# Altium PCB AT89C51.PcbDoc
Units mil, origin at the board's own origin, x right, y up, seen from the top; angles counter-clockwise.
Board outline 10535 x 9685 mil, 2 copper layers (Top Layer, Bottom Layer); 61 components, 49 nets, 164 pads, 8 vias.
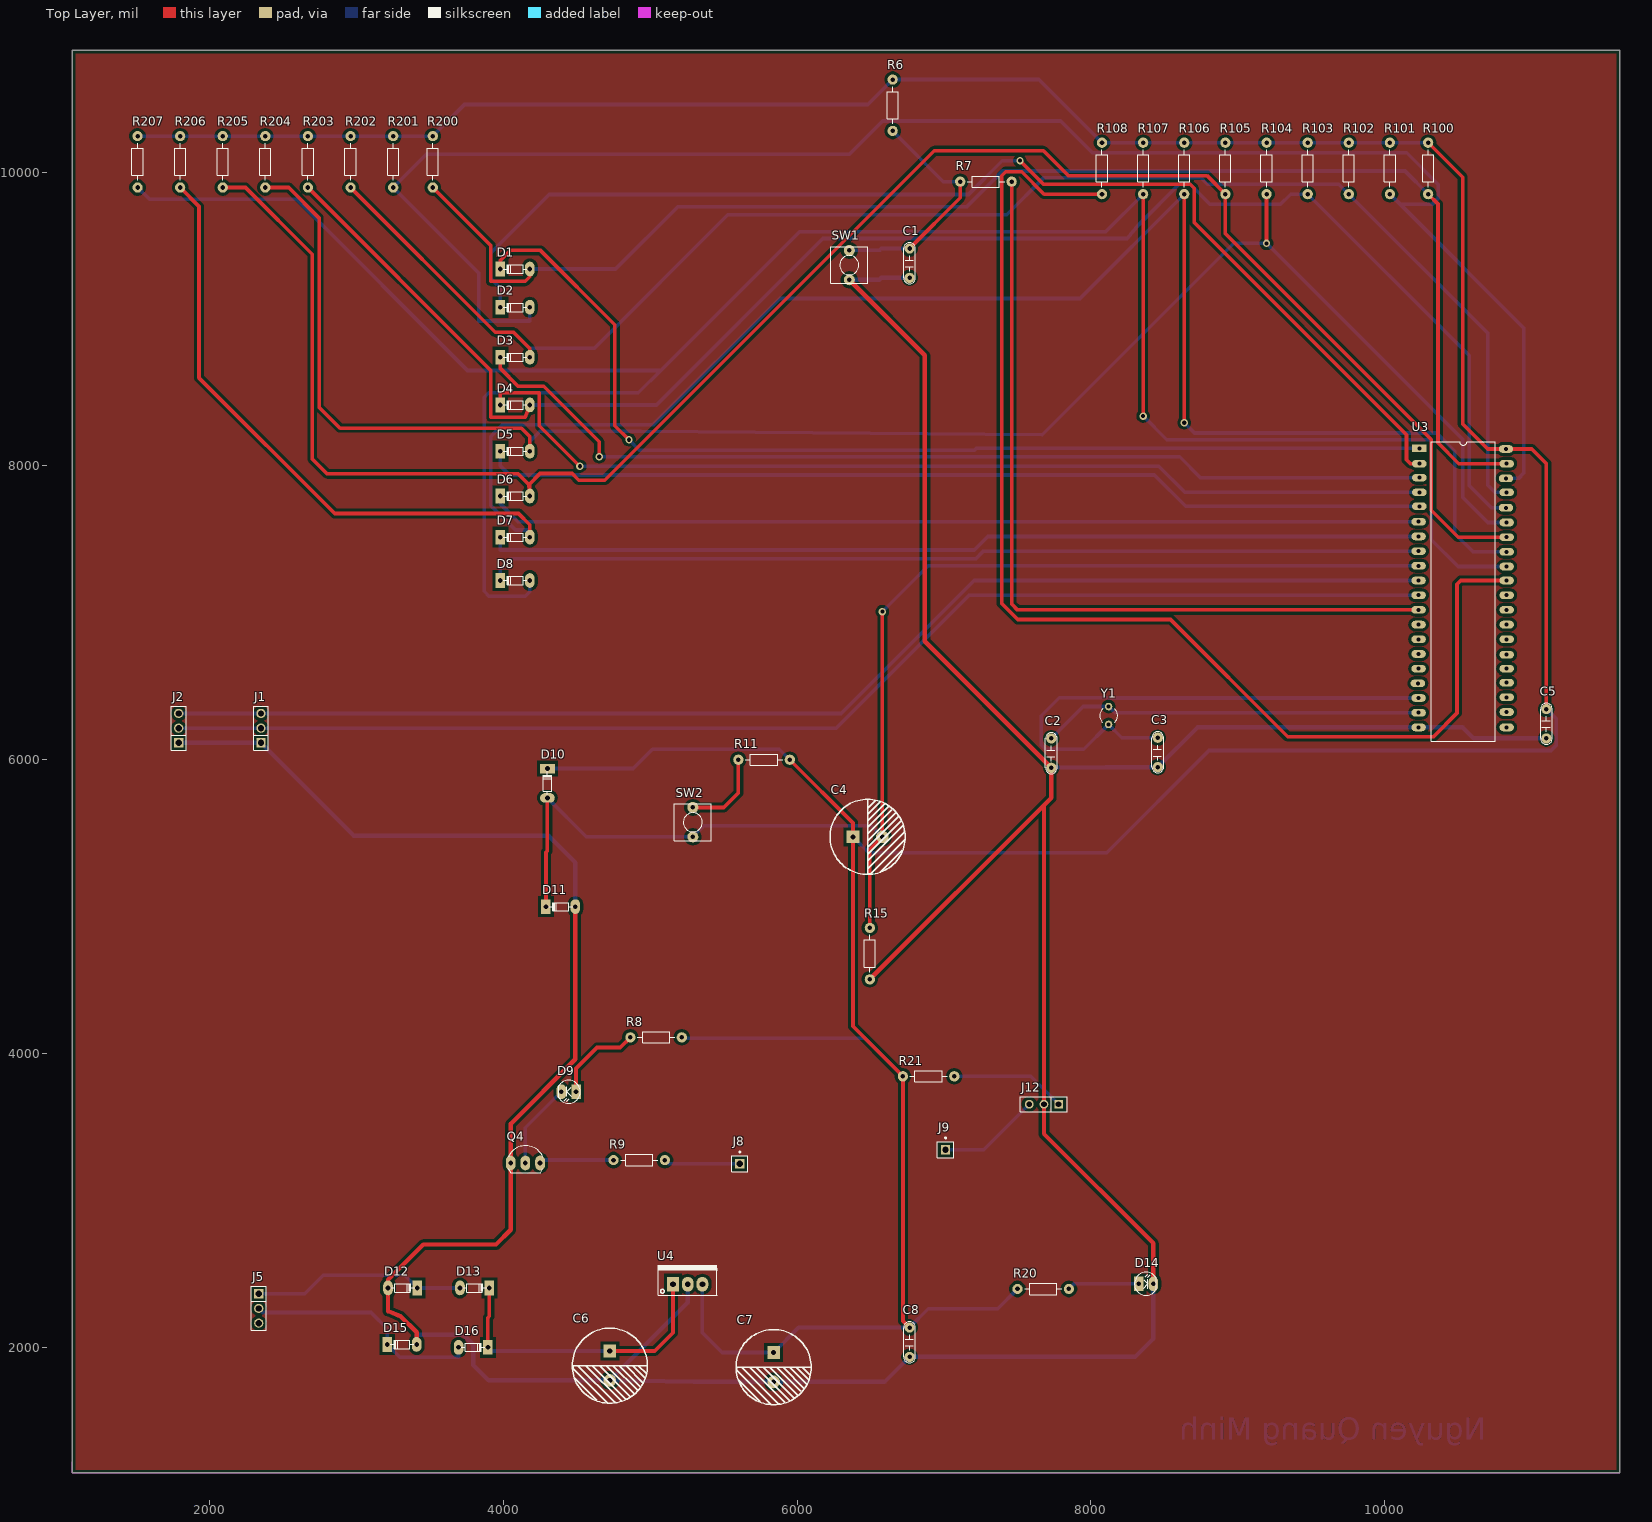
[diagram p0: Top Layer view]
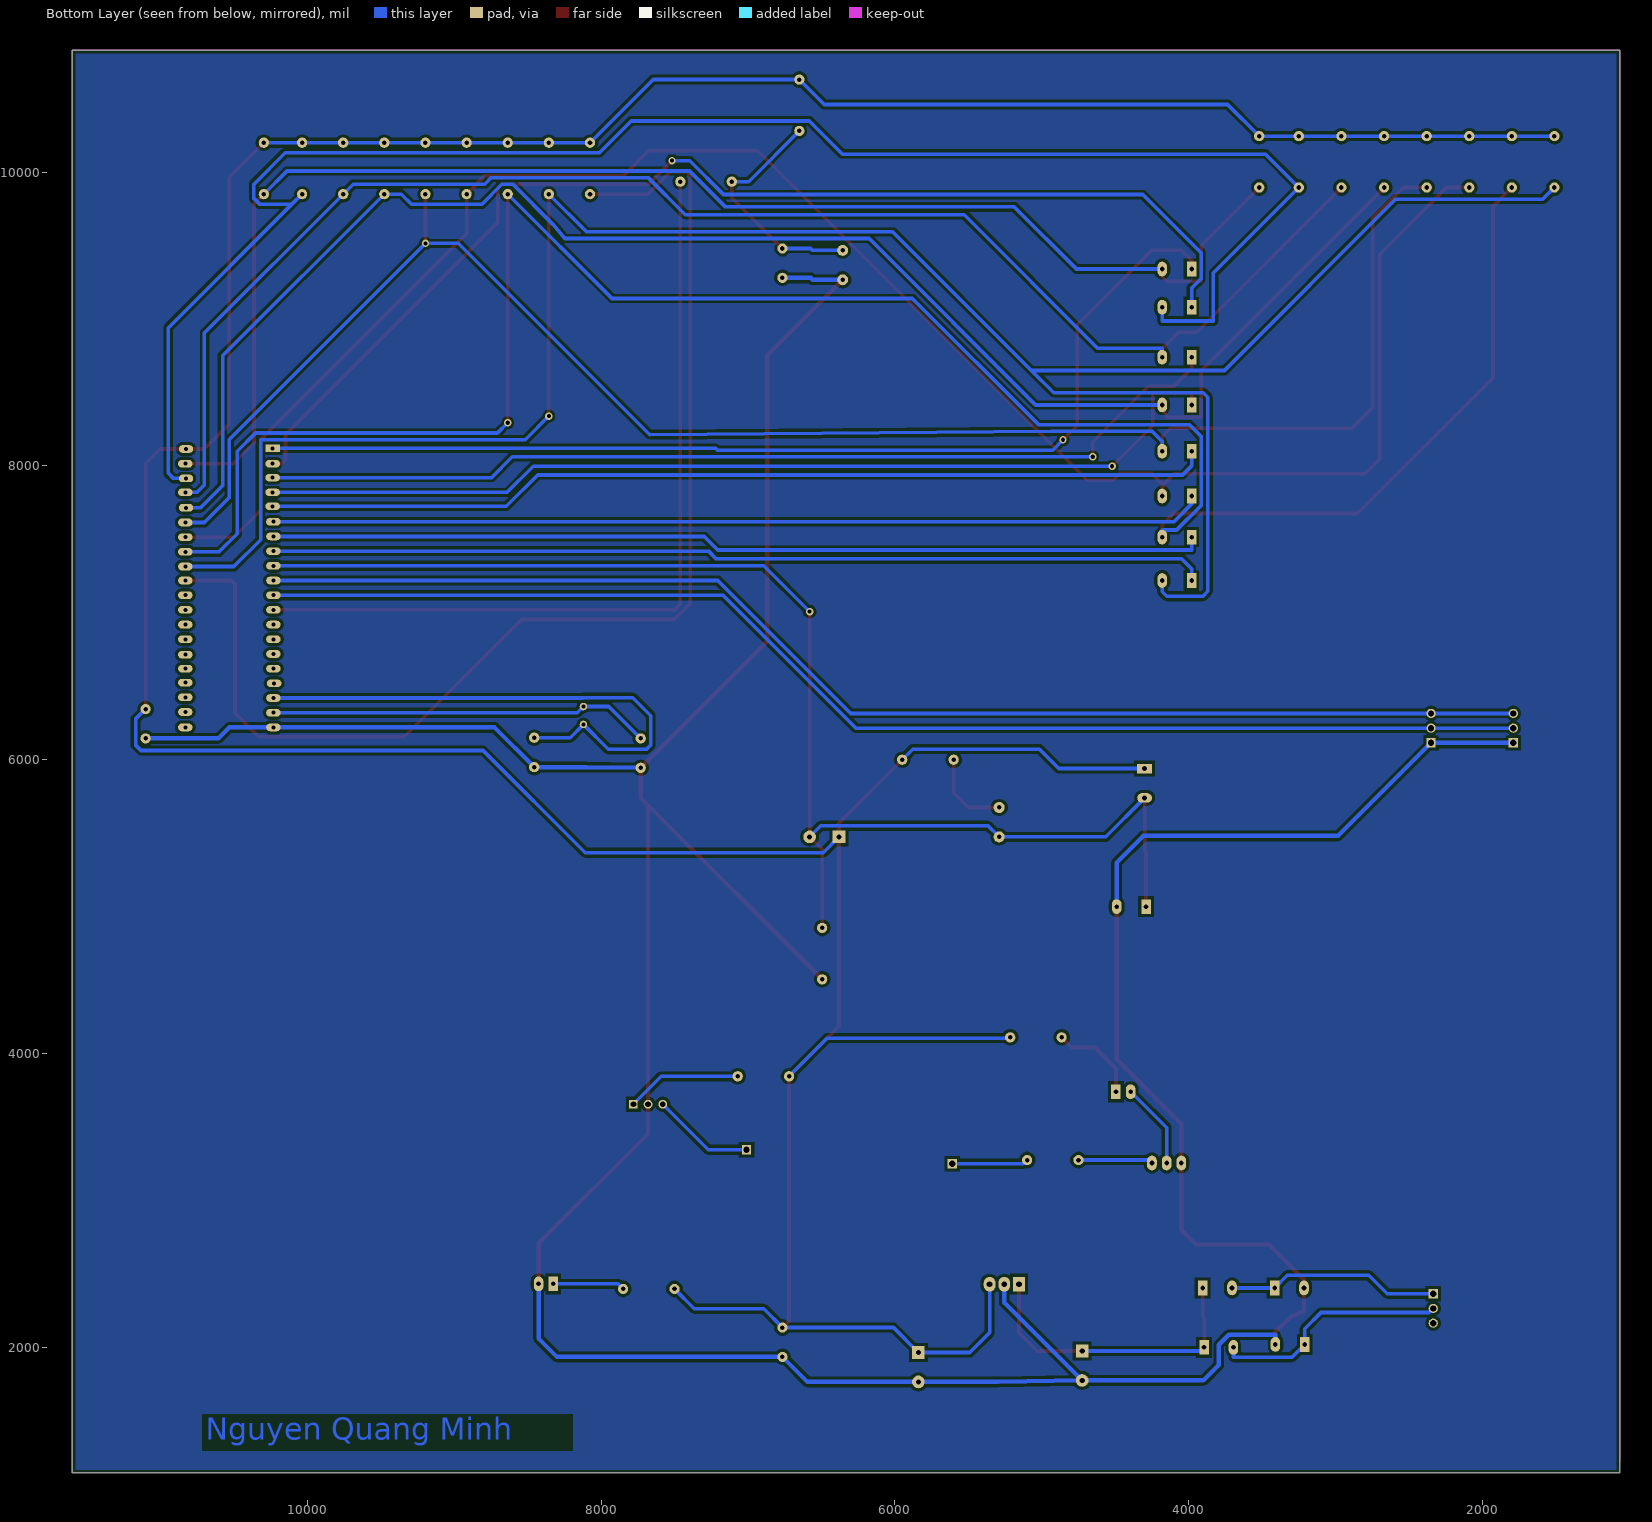
[diagram p1: Bottom Layer view, seen from below]
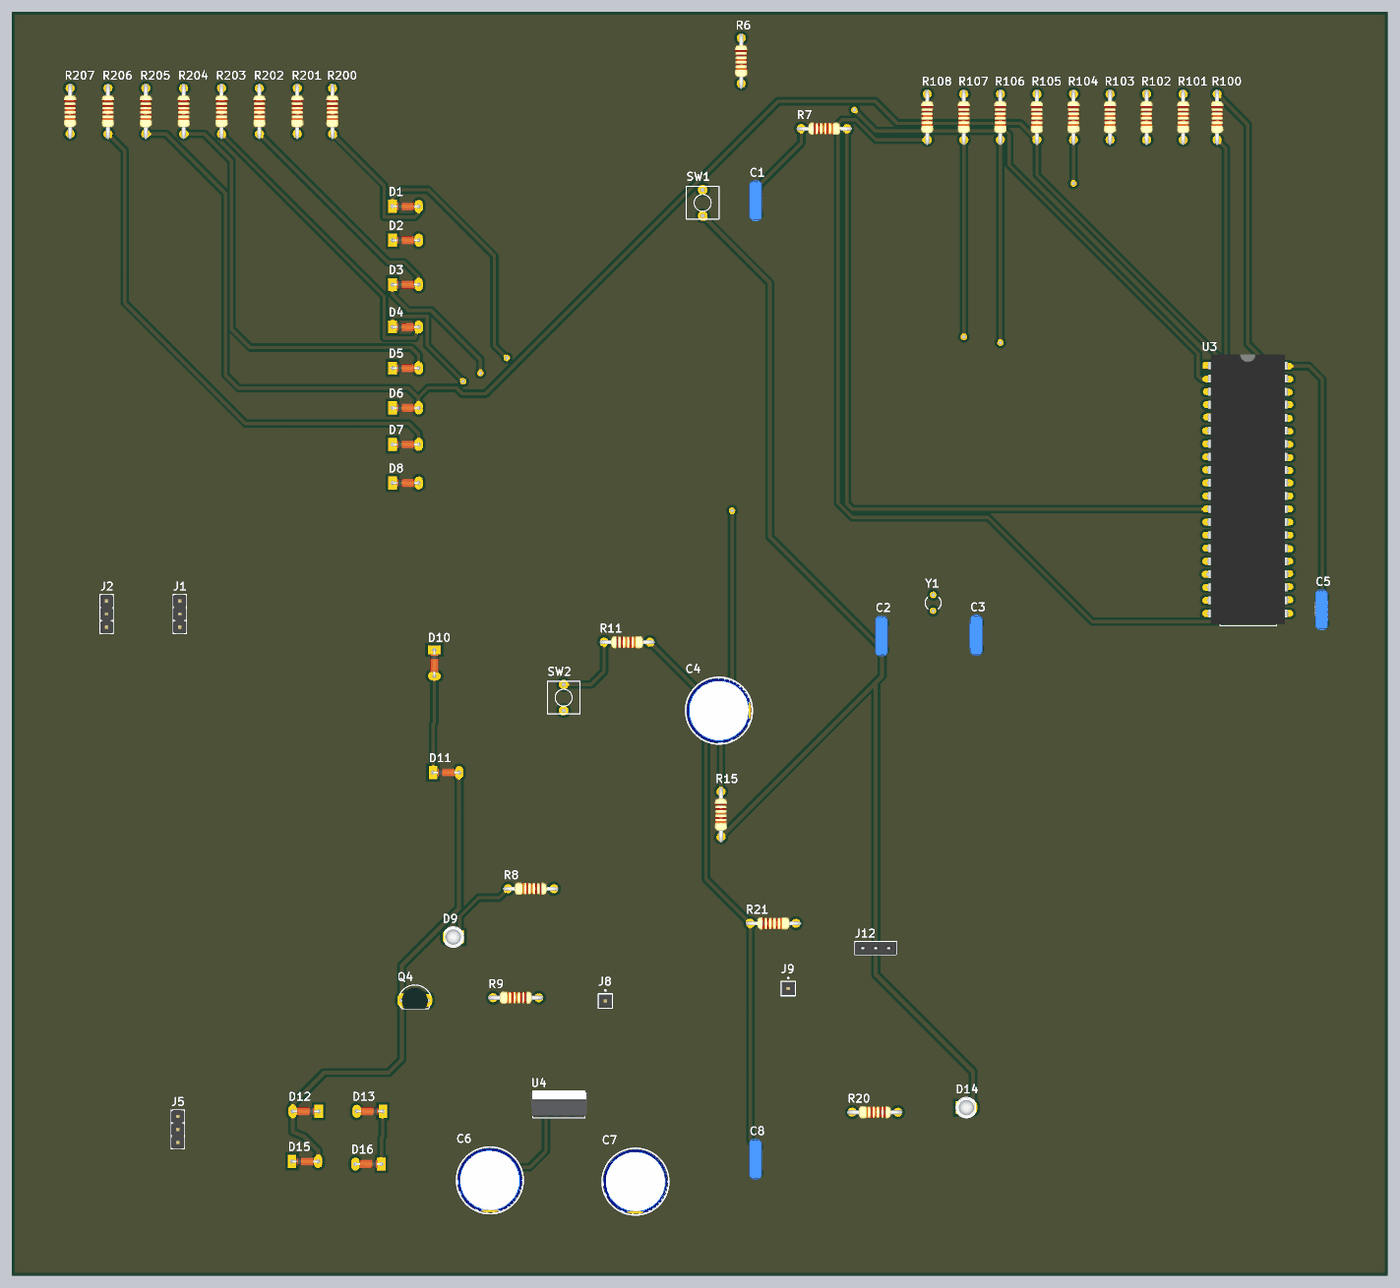
[diagram p2: 3D render of the assembled board from above, using the file's embedded part models]

## Layer stack, top to bottom
Top Solder: solder mask 0.4, Solder Resist, Dk 3.5
Top Layer: signal copper 1.4
Dielectric 1: dielectric 12.6, FR-4, Dk 4.8
Bottom Layer: signal copper 1.4
Bottom Solder: solder mask 0.4, Solder Resist, Dk 3.5

## Board outline
1065,1145 1065,1220 1065,10830 11600,10830 11600,1145

## Design rules (kind name [scope] priority, off if disabled: settings)
Clearance [All] p1: gap=20 ignorepadtopadclearanceinfootprint=FALSE
PolygonConnect [All] p1: connectstyle=Relief reliefconductorwidth=10 reliefentries=4 polygonreliefangle="90 Angle" airgapwidth=10
RoomDefinition AT89C51 [InComponentClass('AT89C51')] p1: confinementstyle=ConfineIn formatcopy=TRUE lockcomponents=FALSE outline 28860,1085 24235,1085 24235,3310 28860,3310
RoutingVias [All] p1: holewidth=28 width=50 viastyle="Through Hole" minholewidth=28 minwidth=50 maxholewidth=28 maxwidth=50
SolderMaskExpansion [All] p1: expansion=4 istentingtop=FALSE
Width "Schematic Width Constraint" [InNet('GND')] p1: maxlimit=30 minlimit=30 preferedwidth=30
Width [All] p2: maxlimit=30 minlimit=20 preferedwidth=25
30 further rules are at their usual default settings.

## Components (designator, comment, footprint, x,y, rotation, side; value= is the part's Value field where it differs from the comment)
C1 "104" CN2 6765,9280 r90 top value=0.1uF
C2 "104" CN2 7730,5945 r90 top value=0.1uF
C3 "104" CN2 8455,5950 r90 top value=0.1uF
C4 "10uF" "tu hoa 13mm" 6480,5475 r0 top
C5 "104" CN2 11100,6145 r90 top value=0.1uF
C6 "10uF" "tu hoa 13mm" 4725,1875 r270 top
C7 "10uF" "tu hoa 13mm" 5840,1865 r270 top
C8 "104" CN2 6765,1935 r90 top value=0.1uF
D1 "100v" "DIODE 0.5A" 4080,9340 r0 top
D2 "100v" "DIODE 0.5A" 4080,9080 r0 top
D3 "100v" "DIODE 0.5A" 4080,8740 r0 top
D4 "100v" "DIODE 0.5A" 4080,8415 r0 top
D5 "100v" "DIODE 0.5A" 4080,8100 r0 top
D6 "100v" "DIODE 0.5A" 4080,7795 r0 top
D7 "100v" "DIODE 0.5A" 4080,7515 r0 top
D8 "100v" "DIODE 0.5A" 4080,7220 r0 top
D9 "LED" LED-3 4495,3740 r180 top value="LED 3 ly Single Colour"
D10 "100v" "DIODE 0.5A" 4300,5840 r270 top
D11 "100v" "DIODE 0.5A" 4390,5000 r0 top
D12 "100v" "DIODE 0.5A" 3315,2404.5 r180 top
D13 "100v" "DIODE 0.5A" 3805,2404.5 r180 top
D14 "LED" LED-3 8325,2432.4 r0 top value="LED 3 ly Single Colour"
D15 "100v" "DIODE 0.5A" 3310,2020 r0 top
D16 "100v" "DIODE 0.5A" 3795,2000 r180 top
J1 "JP 1x3 2.54" "JP 1x3 DT" 2350,6115 r90 top
J2 "JP 1x3 2.54" "JP 1x3 DT" 1790,6115 r90 top
J5 "JP 1x3 2.54" "JP 1x3 DT" 2335,2365 r270 top
J8 "JP 1x1 2.54" "JP 1x1 DT" 5610,3250 r0 top
J9 "JP 1x1 2.54" "JP 1x1 DT" 7010,3345 r0 top
J12 "JP 1x3 2.54" "JP 1x3 CT" 7780,3655 r180 top
Q4 "C1815" TO92 4150,3255 r0 top value=C9014
R6 "Res1" R1/4W 6650,10280 r90 top value=1K
R7 "Res1" R1/4W 7460,9935 r180 top value=1K
R8 "Res1" R1/4W 4865,4110 r0 top value=1K
R9 "Res1" R1/4W 4750,3275 r0 top value=1K
R11 "Res1" R1/4W 5950,6000 r180 top value=1K
R15 "Res1" R1/4W 6495,4505 r90 top value=1K
R20 "Res1" R1/4W 7500,2397.5 r0 top value=1K
R21 "Res1" R1/4W 7070,3845 r180 top value=1K
R100 "Res1" R1/4W 10295,9850 r90 top value=1K
R101 "Res1" R1/4W 10035,9850 r90 top value=1K
R102 "Res1" R1/4W 9755,9850 r90 top value=1K
R103 "Res1" R1/4W 9475,9850 r90 top value=1K
R104 "Res1" R1/4W 9195,9850 r90 top value=1K
R105 "Res1" R1/4W 8915,9850 r90 top value=1K
R106 "Res1" R1/4W 8635,9850 r90 top value=1K
R107 "Res1" R1/4W 8355,9850 r90 top value=1K
R108 "Res1" R1/4W 8075,9850 r90 top value=1K
R200 "Res1" R1/4W 3520,9895 r90 top value=1K
R201 "Res1" R1/4W 3250,9895 r90 top value=1K
R202 "Res1" R1/4W 2960,9895 r90 top value=1K
R203 "Res1" R1/4W 2670,9895 r90 top value=1K
R204 "Res1" R1/4W 2380,9895 r90 top value=1K
R205 "Res1" R1/4W 2090,9895 r90 top value=1K
R206 "Res1" R1/4W 1800,9895 r90 top value=1K
R207 "Res1" R1/4W 1510,9895 r90 top value=1K
SW1 "SW" SW2 6355,9267.02 r90 top value="SW chip 2 pin"
SW2 "SW" SW2 5290,5475 r90 top value="SW chip 2 pin"
U3 "AT89C51" AT89C51 10235,8115 r0 top
U4 "LM7805" QTO-220 5155,2430 r0 top
Y1 "XTAL" R38 8120,6301.02 r0 top

## Footprints (in the part's own frame and the unit in brackets; to place one, negate y for a bottom-side part, rotate by r counter-clockwise, add the part's x,y. Pads: shape width x height; smd on the part's side, far side on the other; paste and mask are expansions set on the pad)
AT89C51 [mm]
  rect 2.5x1.33 hole 0.69: 1(0,0.127)
  oval 2.5x1.33 hole 0.69: 2(0,-2.54) 3(0,-4.953) 4(0,-7.493) 5(0,-9.906) 6(-0.127,-12.573) 7(-0.127,-15.113) 8(-0.127,-17.653) 9(-0.127,-20.193) 10(-0.127,-22.733) 11(-0.127,-25.273) 12(-0.127,-27.813) 13(-0.127,-30.353) 14(-0.127,-32.893) 15(-0.127,-35.433) 16(-0.127,-37.973) 17(-0.254,-40.513) 18(-0.127,-43.053) 19(-0.127,-45.593) 20(-0.127,-48.133) 21(15.113,-48.133) 22(15.113,-45.466) 23(15.113,-42.926) 24(15.113,-40.386) 25(15.113,-37.973) 26(15.113,-35.56) 27(15.113,-32.893) 28(15.113,-30.353) 29(15.113,-27.813) 30(15.113,-25.273) 31(15.113,-22.733) 32(15.113,-20.32) 33(15.113,-17.78) 34(15.113,-15.24) 35(15.113,-12.7) 36(14.986,-10.16) 37(15.113,-7.493) 38(14.986,-5.08) 39(15.113,-2.54) 40(14.986,0)
  silkscreen extent 2.08,-50.51 13.11,1.29, body extent -0.26,-50.3 15.24,2.3, height 5
CN2 [mil]
  round 70 hole 31: 1(0,0) 2(200,0)
  silkscreen extent -40,-40 240,40, body extent -54,-44 260,55, height 407
"DIODE 0.5A" [mil] "Diode muoi, xung"
  oval 65x100 hole 32: 1(100,0)
  rect 65x100 hole 32: 2(-100,0)
  silkscreen extent -80,-30 80,28, body extent -108,-33 108,32, height 61
"JP 1x1 DT" [mm] "1pins, 1 row, straight, gold plating"
  rect 1.6x1.6 hole 1.1: 1(0,0)
  silkscreen extent -1.4,-1.4 1.4,2.17, body extent -1.27,-1.27 1.27,1.27, height 8.54
"JP 1x3 CT" [mm]
  rect 1.52x1.52 hole 1.02: 1(0,0)
  round 1.52 hole 1.02: 2(2.54,0) 3(5.08,0)
  silkscreen extent -1.52,-1.27 6.6,1.27, body extent -1.52,-1.25 6.6,1.25, height 8.51
"JP 1x3 DT" [mm]
  rect 1.6x1.6 hole 1.1: 1(0,0)
  round 1.6 hole 1.1: 2(2.54,0) 3(5.08,0)
  silkscreen extent -1.27,-1.27 6.35,1.27, body extent -1.27,-1.27 6.35,1.27, height 8.54
LED-3 [mil] "LED 2 PIN, 3ly Only colour"
  rect 65x100 hole 32: 1(0,0)
  oval 65x100 hole 32: 2(100,0)
  silkscreen extent -29,-78 118,79, body extent -25,-75 113,75, height 217
QTO-220 [mil] "TO-220 - 1-2-3"
  rect 80x100 hole 39: 1(0,0)
  oval 80x100 hole 39: 2(100,0) 3(200,0)
  silkscreen extent -100,-76 300,130, body extent -119,-64 322,121, height 755
R1/4W [mil] "R 1/4W, 2 Pin, 350mil"
  round 70 hole 31: 1(0,0) 2(350,0)
  silkscreen extent 48,-38 302,38, body extent -40,-47 386,47, height 111
R38 [mm] "Crystal, Thru-Hole; 2 Leads; Body 3.1 x 8.2 mm (Dia.xH)"
  round 1.3 hole 0.7: 1(0,1.55) 2(0,-1.55)
  silkscreen extent -1.55,-1.19 1.55,1.17
SW2 [mil] "SW button 2pin, 250x 250 mil"
  round 75 hole 31: 1(0,0) 2(200,0)
  silkscreen extent -25,-125 225,125
TO92 [mil] "TO-92"
  oval 66x100 hole 32: 1(-100,0) 2(0,0) 3(100,0)
  silkscreen extent -117,-65 120,118, body extent -109,-66 109,95, height 245
"tu hoa 13mm" [mm]
  rect 2.2x2.2 hole 0.9: 1(-2.54,0)
  round 2.2 hole 0.9: 2(2.54,0)
  silkscreen extent -6.5,-6.5 6.5,6.5, body extent -6.25,-6.25 6.26,6.25, height 23.02

## Part data
C1 C2 C3 C5 C8: library part CN2, "Cap np 104 => 105pF"
C4 C6 C7: library part "Tu Hoa 10uF 450V 13x20", "Cắm", Chung_Loai=Cắm, Don_Vi=Con, Ma_Hang=MH003950, So_Chan=2, Ten_Linh_Kien="Tụ Hóa 10uF 450V 13x20MM"
D1 D2 D3 D4 D5 D6 D7 D8 D10 D11 D12 D13 D15 D16: library part "Diode 1N4148", "Cắm", Chung_Loai=Cắm, Don_Vi=Con, Ma_Hang=MH001065, Ten_Linh_Kien="Diode 1N4148 DO35 450mA 100V ( 1N4148 DIP)"
D9 D14: "LED Single colour Green and Red"
J1 J2 J5: library part "JP 1x3 2.54 Duc Thang", "Cắm", Chung_Loai=Cắm, Don_Vi=Con, Ma_Hang=MH000903, Ten_Linh_Kien="Jump Đơn Đực 2.54MM 1x40P Thẳng 11MM"
J8 J9: library part "JP 1x1 2.54 Duc Cong", "Cắm", Chung_Loai=Cắm, Don_Vi=Con, Ma_Hang=MH000904, Ten_Linh_Kien="Jump Đơn Đực 2.54MM 1x40P Cong Đứng"
J12: library part "JP 1x3 2.54 Cai Thang", "Cắm", Chung_Loai=Cắm, Don_Vi=Con, Ma_Hang=MH004006, Ten_Linh_Kien="Jump Đơn Cái 2.54MM 1x20P Thẳng"
Q4: "NPN transistor"
R6 R7 R8 R9 R11 R15 R20 R21 R100 R101 R102 R103 R104 R105 R106 R107 R108 R200 R201 R202 R203 R204 R205 R206 R207: library part Res1_1, "Resistor", Manufacturer="Generic Components", Class=Passive, Published=08/06/2000, Publisher="Altium Hobart Technology Centre", SubClass=Resistor
SW1 SW2: library part SW2, "Switch button 2 pin"
U4: library part LM78xx, "On ap +, from + 5 to + 24VDC"
Y1: "Crystal Oscillator", LatestRevisionDate=17-Jul-2002, LatestRevisionNote="Re-released for DXP Platform.", PackageDescription="Crystal, Thru-Hole; 2 Leads; Body 3.1 x 8.2 mm (Dia.xH)", PackageReference=R38, Published=8-Jun-2000, Publisher="Altium Limited"

## Via types
v1: diameter 50, hole 28, Top Layer to Bottom Layer, 8 vias

## Nets (pads, with @x,y where several pads share a name; then routed paths per layer and width w, separated by ;. In a path a pad name is that pad's centre, name@x,y a point inside that pad or via, vN(x,y) a via of type N, cw(c..) or ccw(c..) an arc to the next point about the centre after c; other vN are vias at no path point)
1: C4.1 C5.2 C7.1 C8.2 D10.2 R6.2 R8.2 R11.1 R20.1 R21.2 R100.2 R101.2 R102.2 R103.2 R104.2 R105.2 R106.2 R107.2 R108.2 R200.2 R201.2 R202.2 R203.2 R204.2 R205.2 R206.2 R207.2 U3.40 U4.3 | length 29158.2
  Top Layer w25: R11.1 6380,5570 C4.1 6380,4185 R21.2 6720,2180 C8.2 ; R100.2 10530,9965 10530,8285 10700,8115 U3.40 11000,8115 11100,8015 C5.2
  Bottom Layer w25: R207.2 R206.2 R205.2 R204.2 R203.2 R202.2 R201.2 R200.2 3735,10460 6480,10460 R6.2 7645,10630 R108.2 R107.2 R106.2 R105.2 R104.2 R103.2 R102.2 R101.2 R100.2 ; D10.2 4884,5940 5016,6072 5878,6072 R11.1 ; R8.2 5220,4105 6460,4105 R21.2 ; U4.3 5355,2100 5490,1965 C7.1 6010,2135 C8.2 6893,2263 7365.5,2263 R20.1 ; C4.1 6488,5367 8107,5367 8803,6063 11131,6063 11168,6100 11168,6277 C5.2
2: D1.1 R100.1 R200.1 U3.39 | length 9836.3
  Top Layer w25: R200.1 3915,9500 3915,9257 4150,9257 4180,9287 D1.1 ; R100.1 10361.71,9783.29 10361.71,8157.29 10504,8015 U3.39
  Bottom Layer w25: D1.1 4764,9340 5187,9763 7153,9763 7397.5,10007.5 10137.5,10007.5 R100.1
3: D2.1 R101.1 R201.1 U3.38 | length 11856
  Bottom Layer w25: D2.1 4180,8986 3832,8986 3832,9313 R201.1 3477,10122 6357,10122 6583,10348 7794,10348 8010,10132 10149,10132 10363,9918 10363,9820 10325,9782 10103,9782 ; R101.1 10103,9782 ; U3.38 10910,7915 10945,7950 10945,8940 10103,9782
4: D3.1 R102.1 R202.1 U3.37 | length 10418.8
  Top Layer w25: R202.1 3945,8910 4070,8910 4180,8800 D3.1
  Bottom Layer w25: D3.1 4180,8800 4618,8800 5528,9710 7427,9710 7679.5,9962.5 8747.72,9962.5 8792.22,9918 9687,9918 R102.1 10700,8905 10700,7870 10750,7820 U3.37
5: D4.1 R103.1 R203.1 U3.36 | length 11162.8
  Top Layer w25: R203.1 3915,8650 3915,8332 4150,8332 D4.1
  Bottom Layer w25: D4.1 5042,8415 6174.5,9547.5 8246.5,9547.5 8326.32,9643.82 8600,9917.5 8675,9917.5 8812.5,9780 9289,9780 9359,9850 R103.1 10576,8749 10576,7865 10726,7715 U3.36
6: D5.1 R104.1 R204.1 U3.35 | length 11994.8
  Top Layer w25: R204.1 2539,9895 2746,9688 2746,8400 2889,8257 4123,8257 4180,8200 D5.1 ; v1(9195,9515) R104.1
  Bottom Layer w25: D5.1 4180,8166 4250,8236 4936.24,8236 7669,8212 8972,9515 v1(9195,9515) 10530,8180 10530,7785 10700,7615 U3.35
7: D6.1 R105.1 R205.1 U3.34 | length 13058.5
  Top Layer w25: R205.1 2245,9895 2700,9440 2700,8047 2800,7947 4100,7947 4174.5,7872.5 ; U3.34 10500,7515 10316.71,7698.29 10316.71,8179 8915,9580.71 R105.1 8789,9976 7845.12,9976 7676.12,10145 6933,10145 4691.08,7903.08 4513.65,7903.08 4468.73,7948 4250,7948 4174.5,7872.5 ; 4174.5,7872.5 4180,7867 D6.1 4174.5,7872.5
8: D7.1 R106.1 R206.1 U3.33 | length 14798.6
  Top Layer w25: R206.1 1929,9766 1929,8599 2852,7676 4104,7676 4180,7600 D7.1 ; v1(8635,8294) R106.1
  Bottom Layer w25: D7.1 4180,7564 4082,7564 3915,7731 3915,8200 3996.24,8281.24 5022.24,8281.24 5881,9140 7925,9140 R106.1 ; v1(8635,8294) 8705.32,8223.68 10352.32,8223.68 10477,8099 10477,7538 10600,7415 U3.33
9: D8.1 R107.1 R207.1 U3.32 | length 15678.1
  Top Layer w25: v1(8355,8339) R107.1
  Bottom Layer w25: R207.1 1589,9816 2590,9816 3756,8650 5071,8650 ; D8.1 4180,7143 4150,7113 3903,7113 3870,7146 3870,8468 3900,8498 4919,8498 5071,8650 ; v1(8355,8339) 8515.32,8178.68 10317,8178.68 10317,7498 10500,7315 U3.32 ; R107.1 8098,9593 6014,9593 5071,8650
10: R108.1 U3.31 | length 8436.7
  Top Layer w25: R108.1 7681,9850 7528,10003 7420,10003 7392,9975 7392,7064 7501,6955 8542,6955 9340,6157 10331,6157 10492,6318 10492,7195 10517,7220 U3.31
COL1: U3.21
COL2: U3.22
COL3: U3.23
COL4: U3.24
"DIGIT 1": U3.14
"DIGIT 2": U3.15
"DIGIT 3": U3.16
GND: C1.1 C2.1 C3.1 C5.1 C6.2 C7.2 C8.1 D11.1 D12.1 D14.2 D15.1 J1.1 J2.1 J12.2 Q4.1 R15.1 SW1.1 U3.20 U4.2 | length 27234.2
  Top Layer w30: D15.1 3410,2102 3300,2212 3215,2247 D12.1 3215,2460 3455,2700 3950,2700 4050,2800 Q4.1 4050,3521 4490,3961 D11.1 ; SW1.1 6869,8753.02 6869,6806 C2.1 7730,5740 7680,5690 ; R15.1 7680,5690 ; D14.2 8425,2708 7680,3453 J12.2 7680,5690
  Bottom Layer w30: J2.1 J1.1 2983,5482 4308,5482 4490,5300 D11.1 ; D15.1 3410,2085 3728,2085 3795,2018 3795,1880 3900,1775 C6.2 ; U4.2 5255,2305 C6.2 ; SW1.1 6560,9267.02 6572.98,9280 C1.1 ; C2.1 8098,5950 C3.1 8725,6220 U3.20 10530,6220 10605,6145 C5.1 ; D14.2 8425,2060 8300,1935 C8.1 6595,1765 C7.2 5293,1765 C6.2
IR: U3.13
"LED 1": D1.2 U3.1 | length 7313.9
  Top Layer w25: D1.2 3980,9400 4047,9467 4253,9467 4759,8961 4759,8274 v1(4855,8178)
  Bottom Layer w25: v1(4855,8178) 4926,8107 7208,8107 7221,8120 U3.1
"LED 2": D2.2 U3.2 | length 8067.5
  Top Layer w25: v1(7516.82,10077.82) 7676.64,9918 8675,9918 8703,9890 8703,9657 10148,8212 10148,8042 10175,8015 U3.2
  Bottom Layer w25: D2.2 3980,9210 3915,9275 3915,9450 4313,9848 7167,9848 7396.82,10077.82 v1(7516.82,10077.82)
"LED 3": D3.2 U3.3 | length 6700.1
  Top Layer w25: D3.2 3980,8662.5 4100,8542.5 4275,8542.5 4653,8164.5 v1(4653,8062)
  Bottom Layer w25: v1(4653,8062) 8604,8062 8746,7920 U3.3
"LED 4": D4.2 U3.4 | length 6749.1
  Top Layer w25: D4.2 3980,8497.5 4245,8497.5 4245,8274 v1(4521,7998)
  Bottom Layer w25: v1(4521,7998) 8461.55,7998 8639.55,7820 U3.4
"LED 5": D5.2 U3.5 | length 6468.9
  Bottom Layer w25: D5.2 3980,8000 4042,7938 8431.55,7938 8644.55,7725 U3.5
"LED 6": D6.2 U3.6 | length 6354.7
  Bottom Layer w25: D6.2 3980,7740 4100,7620 U3.6
"LED 7": D7.2 U3.7 | length 6375.1
  Bottom Layer w25: D7.2 3980,7428 7205,7428 7297,7520 U3.7
"LED 8": D8.2 U3.8 | length 6379.7
  Bottom Layer w25: D8.2 3980,7300 4047,7367 7215,7367 7268,7420 U3.8
MANUAL_INTERRUPT: R7.1 U3.12 | length 5661.6
  Top Layer w25: R7.1 7460,7060 7500,7020 U3.12
NetC1_2: C1.2 R6.1 R7.2 SW1.2 | length 1616.2
  Top Layer w25: C1.2 7110,9825 R7.2
  Bottom Layer w25: SW1.2 6560,9467.02 6572.98,9480 C1.2 ; R6.1 6995,9935 R7.2
NetC2_2: C2.2 U3.19 Y1.1 | length 2607.3
  Bottom Layer w25: C2.2 7947.05,6362.05 Y1.1 8162.05,6320 U3.19
NetC3_2: C3.2 U3.18 Y1.2 | length 3731.7
  Bottom Layer w25: C3.2 8210,6150 Y1.2 7951,6071 7691,6071 7662,6100 7662,6300 7784,6422 8123,6422 8125,6420 U3.18
NetC4_2: C4.2 D10.1 D11.2 R15.2 SW2.1 U3.9 | length 9164.3
  Top Layer w25: D11.2 4290,5370 4300,5380 D10.1 ; R15.2 6495,5390 C4.2 v1(6580,7008)
  Bottom Layer w25: D10.1 4565,5475 SW2.1 5366,5551 6504,5551 C4.2 ; v1(6580,7008) 6892,7320 U3.9
NetC6_1: C6.1 D13.2 D16.2 U4.1 | length 2075.4
  Top Layer w25: D16.2 3895,2202 3905,2212 D13.2 ; C6.1 5030,1975 5155,2100 U4.1
  Bottom Layer w25: D16.2 3895,1975 C6.1
NetD9_1: D9.1 R8.1 | length 615.8
  Top Layer w25: D9.1 4495,3898 4638,4041 4796,4041 R8.1
NetD9_2: D9.2 Q4.2 | length 586.5
  Bottom Layer w25: Q4.2 4150,3495 D9.2
NetD12_2: D12.2 D13.1 J5.1 | length 1458
  Bottom Layer w25: J5.1 2649,2365 2775,2491 3328.5,2491 D12.2 D13.1
NetD14_1: D14.1 R20.2 | length 489.5
  Bottom Layer w25: R20.2 7884.9,2432.4 D14.1
NetD15_2: D15.2 D16.1 J5.2 | length 1627.2
  Bottom Layer w25: J5.2 2363,2237 3100,2237 3210,2127 D15.2 3297,1933 3695,1933 D16.1
NetJ8_1: J8.1 R9.2 | length 520.4
  Bottom Layer w25: R9.2 5125,3250 J8.1
NetJ9_1: J9.1 J12.3 | length 698.4
  Bottom Layer w25: J9.1 7270,3345 J12.3
NetJ12_1: J12.1 R21.1 | length 788.7
  Bottom Layer w25: R21.1 7590,3845 J12.1
NetQ4_3: Q4.3 R9.1 | length 520
  Bottom Layer w25: Q4.3 4250,3275 R9.1
NetR11_2: R11.2 SW2.2 | length 576.4
  Top Layer w25: SW2.2 5500,5675 5600,5775 R11.2
ROW1: U3.25
ROW2: U3.26
ROW3: U3.27
ROW4: U3.28
RXD: J1.3 J2.3 U3.10 | length 8814.9
  Bottom Layer w25: J2.3 J1.3 6300,6315 7205,7220 U3.10
TXD: J1.2 J2.2 U3.11 | length 8814.9
  Bottom Layer w25: J2.2 J1.2 6264,6215 7169,7120 U3.11
pads on no net: J5.3 U3.17 U3.29 U3.30

## Polygon pours and split planes (outlines as drawn)
no net on Top Layer "NONET_L01_P000" (solid, pour order 0): 1065,10830 11600,10830 11600,1145 1065,1145
no net on Bottom Layer "NONET_L02_P001" (solid, pour order 1): 1065,10830 11600,10830 11600,1145 1065,1145

## Keep-outs
Keep-Out Layer:
  lines w5: 1065,1145 11595,1145 11600,1145 11600,10830 1065,10830 1065,1220 1065,1145

## Other copper
Bottom Layer:
  text "Nguyen Quang Minh" at 10690,1369.98 h150